# Altium PCB SystemM.PcbDoc
Units mm, origin at the board's own origin, x right, y up, seen from the top; angles counter-clockwise.
Board outline 120 x 76 mm, 4 copper layers (Top Layer, POWER, GND, Bottom Layer), stack 0.778 mm thick; 154 components, 135 nets, 622 pads, 2 vias.
Unrouted connection lines stored in the file: 395.
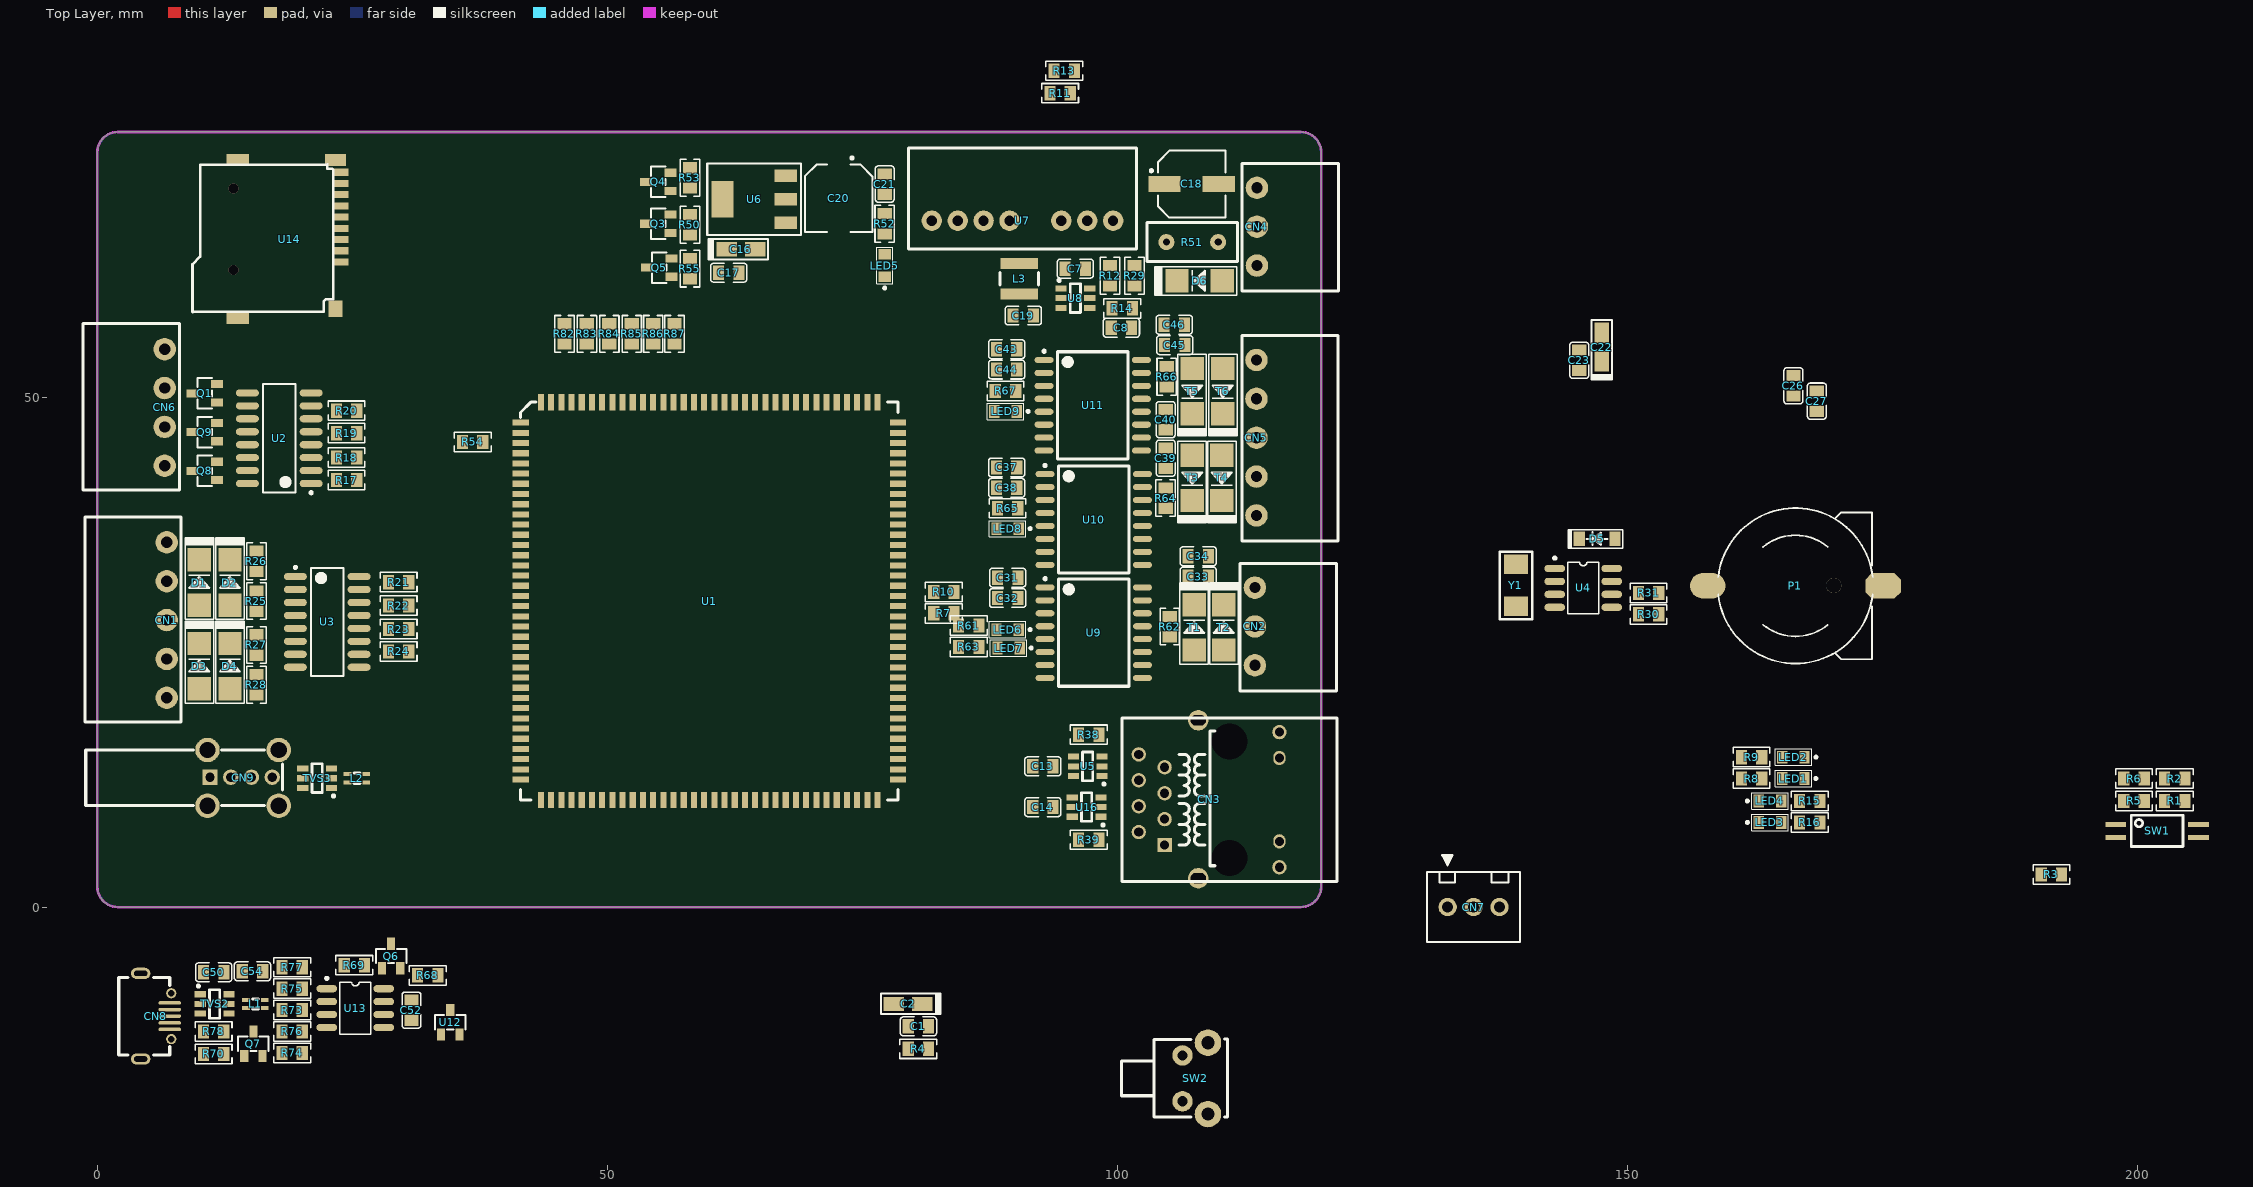
[diagram p0: Top Layer view]
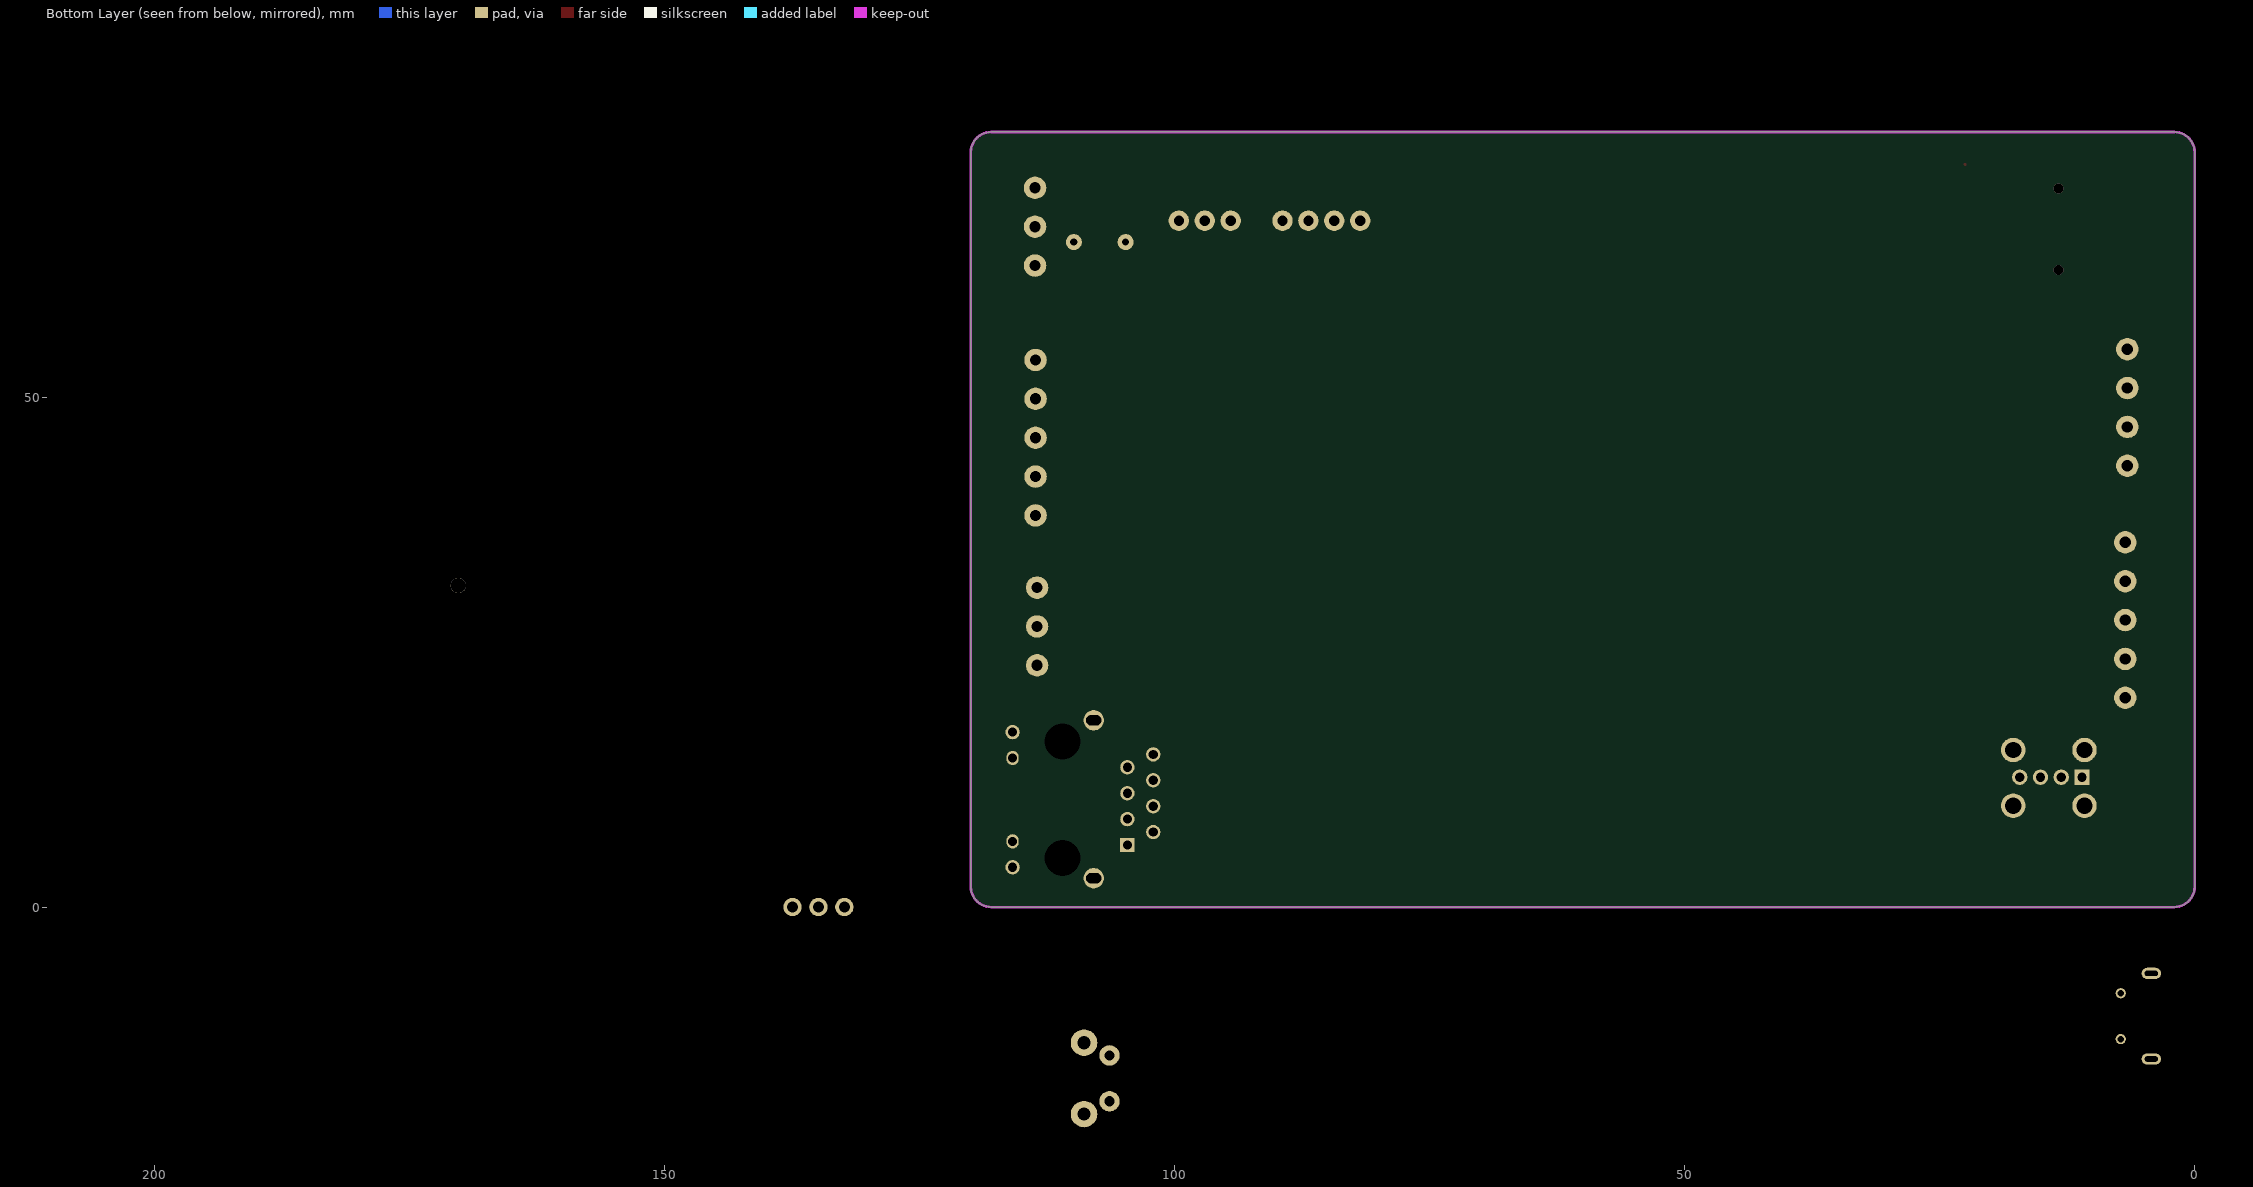
[diagram p1: Bottom Layer view, seen from below]
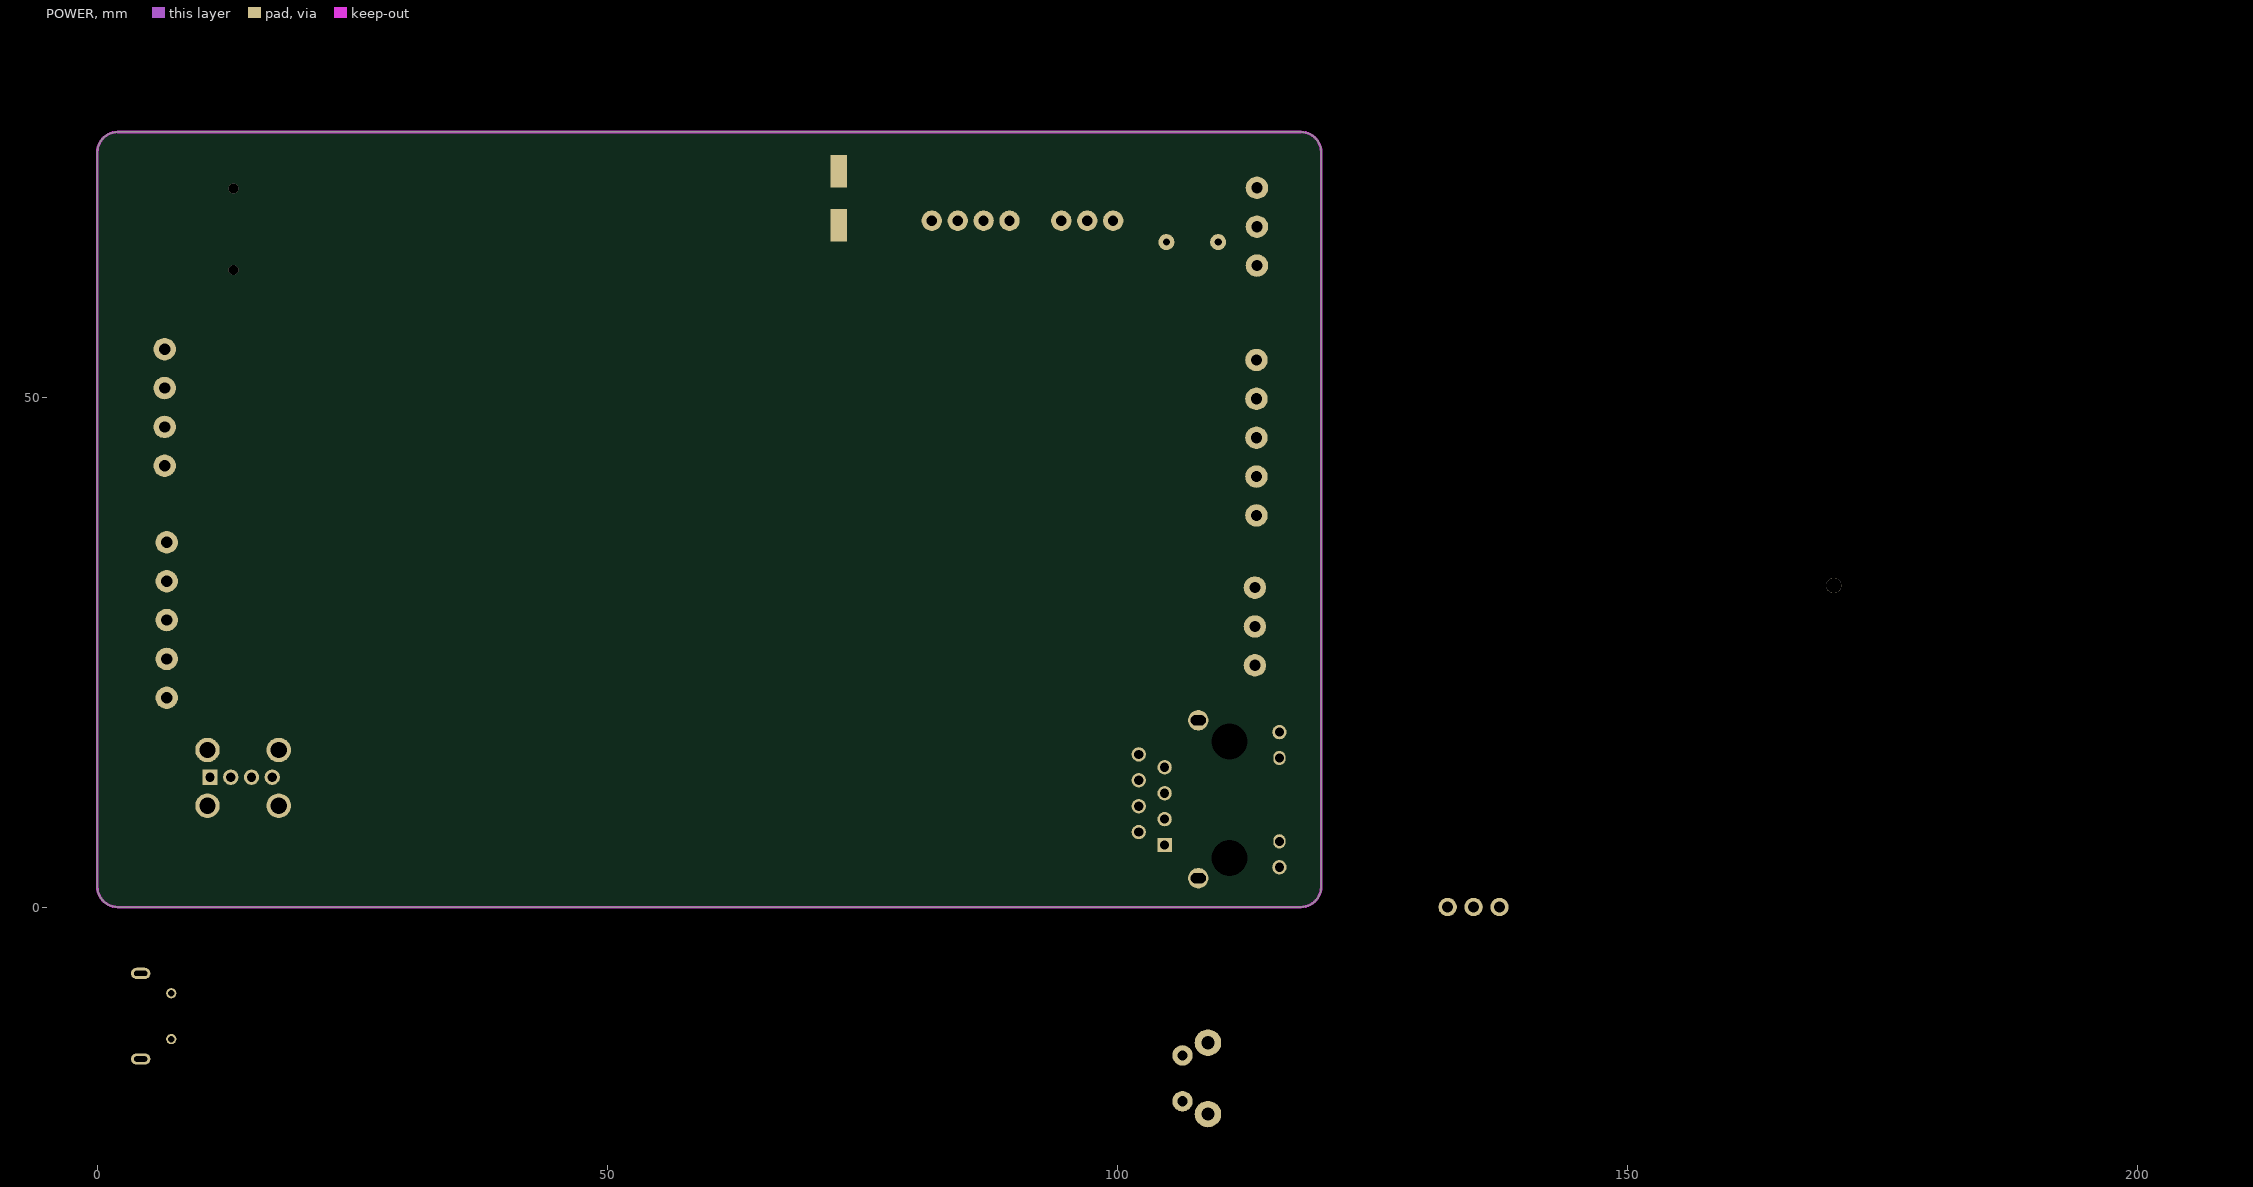
[diagram p2: POWER]

## Layer stack, top to bottom
Top Solder: solder mask 0.0102, Solder Resist, Dk 3.5
Top Layer: signal copper 0.0356
Dielectric 1: core 0.254, FR-4, Dk 4.2
POWER: signal copper 0.036
Dielectric 3: prepreg 0.127, Dk 4.2
GND: signal copper 0.036
Dielectric 2: core 0.254, Dk 4.2
Bottom Layer: signal copper 0.0356
Bottom Solder: solder mask 0.0102, Solder Resist, Dk 3.5

## Board outline
0,2 0,74 cw(c2,74) 2,76 118,76 cw(c118,74) 120,74 120,2 cw(c118,2) 118,0 2,0 cw(c2,2)

## Design rules (kind name [scope] priority, off if disabled: settings)
Clearance [All] p1: gap=0.254
PlaneClearance [All] p1: clearance=0.127
PolygonConnect [All] p1: connectstyle=Relief reliefconductorwidth=0.254 reliefentries=4 polygonreliefangle="90 Angle" airgapwidth=0.254
RoutingVias [All] p1: holewidth=0.711 width=1.27 viastyle="Through Hole" minholewidth=0.711 minwidth=1.27 maxholewidth=0.711 maxwidth=1.27
SolderMaskExpansion [All] p1: expansion=0.102
Width [All] p1: maxlimit=0.254 minlimit=0.254 preferedwidth=0.254
28 further rules are at their usual default settings.

## Classes and differential pairs
component class Usb_SdCard: C50 C52 C54 CN8 CN9 L1 L2 Q6 Q7 R68 R69 R70 R73 R74 R75 R76 R77 R78 R82 R83 R84 R85 R86 R87 TVS2 TVS3 U12 U13 U14
component class Uart_Can: C31 C32 C33 C34 C37 C38 C39 C40 C43 C44 C45 C46 CN2 CN5 CN7 LED6 LED7 LED8 LED9 R3 R4 R5 R6 R61 R62 R63 R64 R65 R66 R67 T1 T2 T3 T4 T5 T6 U9 U10 U11
component class Power: C7 C8 C16 C17 C18 C19 C20 C21 C22 C23 C26 C27 CN4 D6 L3 LED5 Q3 Q4 Q5 R11 R12 R13 R14 R29 R50 R51 R52 R53 R54 R55 U6 U7 U8
component class NetMY: C13 C14 CN3 R38 R39 U5 U16
component class Gpio_RTC: CN1 CN6 D1 D2 D3 D4 D5 P1 Q1 Q8 Q9 R17 R18 R19 R20 R21 R22 R23 R24 R25 R26 R27 R28 R30 R31 U2 U3 U4 Y1
component class CpuMY: C1 C2 LED1 LED2 LED3 LED4 R1 R2 R7 R8 R9 R10 R15 R16 SW1 SW2 U1

## Components (designator, comment, footprint, x,y, rotation, side; value= is the part's Value field where it differs from the comment)
C1 "104" 0805SMD_Cap 80.5,-11.7 r0 top
C2 "10uF/10V" "CASE A" 79.5,-9.5 r180 top
C7 "0.1uF" 0805SMD_Cap 95.9,62.6 r180 top
C8 "75pF" 0805SMD_Cap 100.4,56.8 r0 top
C13 "100nF" 0805SMD_Cap 92.7,13.8 r0 top
C14 "100nF" 0805SMD_Cap 92.7,9.8 r0 top
C16 "10uF/10V" "CASE A" 63.1,64.5 r0 top
C17 "104" 0805SMD_Cap 61.9,62.2 r0 top
C18 "47uF/50V" HONOR_63X54#1 107.3,70.9 r0 top
C19 "104" 0805SMD_Cap 90.8,58 r180 top
C20 "100uF/10V" HONOR_63X54#2 72.7,69.5 r270 top
C21 "104" 0805SMD_Cap 77.2,70.9 r270 top
C22 "10uF/10V" "CASE A" 147.5,54.9 r90 top
C23 "104" 0805SMD_Cap 145.3,53.6 r90 top
C26 "22uF" 0805SMD_Cap 166.3,51.1 r90 top
C27 "104" 0805SMD_Cap 168.6,49.6 r90 top
C31 "10uF" 0805SMD_Cap 89.25,32.3 r0 top
C32 "104" 0805SMD_Cap 89.25,30.3 r0 top
C33 "104" 0805SMD_Cap 107.95,32.4 r180 top
C34 "10uF" 0805SMD_Cap 107.95,34.4 r180 top
C37 "10uF" 0805SMD_Cap 89.15,43.1 r0 top
C38 "104" 0805SMD_Cap 89.15,41.1 r0 top
C39 "104" 0805SMD_Cap 104.75,44 r90 top
C40 "10uF" 0805SMD_Cap 104.75,47.8 r270 top
C43 "10uF" 0805SMD_Cap 89.15,54.7 r0 top
C44 "104" 0805SMD_Cap 89.15,52.7 r0 top
C45 "104" 0805SMD_Cap 105.65,55.1 r180 top
C46 "10uF" 0805SMD_Cap 105.6,57.1 r180 top
C50 "104" 0805SMD_Cap 11.4,-6.4 r0 top
C52 "104" 0805SMD_Cap 30.8,-10.1 r270 top
C54 "104" 0805SMD_Cap 15.2,-6.3 r0 top
CN1 "CON5" WJ15EDGRM-3.81-5P 6.8,35.76 r270 top locked
CN2 "CON3" WJ15EDGRM-3.81-3P-14-00A 113.5,23.7 r90 top
CN3 "HR911105A" RJ-45A12 115.9,3.9 r0 top locked
CN4 "CON3" WJ15EDGRM-3.81-3P-14-00A 113.7,62.9 r90 top
CN5 "CON5" WJ15EDGRM-3.81-5P 113.65,38.4 r90 top
CN6 "CON4" WJ15EDGRM-3.81-4P-14-00A 6.6,54.7 r270 top
CN7 "CON3" 连接器3X 132.4,0 r0 top
CN8 "MINI_USB" MICRO_USB 2.1,-10.7 r270 top
CN9 "USB-A-F-W" USB-C 17.15,12.733 r180 top
D1 "1N4148" 二极管SMA 10,29.6 r270 top
D2 "1N4148" 二极管SMA 13,29.6 r270 top
D3 "1N4148" 二极管SMA 10,21.4 r270 top
D4 "1N4148" 二极管SMA 13,21.4 r270 top
D5 "1N4148" 二极管SOD-123 148.8,36.1 r0 top
D6 "1N4007" 二极管SMA 110.3,61.4 r0 top
L1 "90" 2012 15.5,-9.5 r180 top
L2 "90" 2012 25.45,12.633 r180 top
L3 "磁珠" 4020 90.4,61.6 r270 top
LED1 "LED" 发光二极管0805 166.3,12.6 r180 top
LED2 "LED" 发光二极管0805 166.3,14.7 r180 top
LED3 "LED" 发光二极管0805 164,8.3 r0 top
LED4 "LED" 发光二极管0805 164,10.4 r0 top
LED5 "LED" 发光二极管0805 77.2,62.9 r90 top
LED6 "LED" 发光二极管0805 89.25,27.2 r180 top
LED7 "LED" 发光二极管0805 89.35,25.4 r180 top
LED8 "LED" 发光二极管0805 89.25,37.1 r180 top
LED9 "LED" 发光二极管0805 89.05,48.6 r180 top
P1 "BAT" CR1220 166.5,31.5 r90 top
Q1 "1318" SOT-23 10.539,50.37 r90 top
Q3 "MOS_P" SOT-23 55,67 r90 top
Q4 "MOS_P" SOT-23 55,71.1 r90 top
Q5 "IRFP360" "SOT-23 - MOS" 55.1,62.7 r90 top
Q6 "1318" SOT-23 28.8,-4.8 r0 top
Q7 "1318" SOT-23 15.3,-13.4 r0 top
Q8 "1318" SOT-23 10.539,42.77 r90 top
Q9 "1318" SOT-23 10.539,46.57 r90 top
R1 "1K" 0805_SMD_R 203.7,10.4 r180 top
R2 "1K" 0805_SMD_R 203.7,12.6 r180 top
R3 "10K" 0805_SMD_R 191.6,3.2 r0 top
R4 "10K" 0805_SMD_R 80.5,-13.9 r180 top
R5 "10K" 0805_SMD_R 199.7,10.4 r180 top
R6 "10K" 0805_SMD_R 199.7,12.6 r180 top
R7 "1K" 0805_SMD_R 83,28.8 r180 top
R8 "1K" 0805_SMD_R 162.2,12.6 r0 top
R9 "1K" 0805_SMD_R 162.2,14.7 r0 top
R10 "1K/NC" 0805_SMD_R 83,30.9 r180 top
R11 "511K" 0805_SMD_R 94.4,79.8 r0 top
R12 "49.9" 0805_SMD_R 99.3,61.9 r90 top
R13 "100K" 0805_SMD_R 94.8,82 r0 top
R14 "100K" 0805_SMD_R 100.5,58.7 r180 top
R15 "1K" 0805_SMD_R 167.9,10.4 r0 top
R16 "1K" 0805_SMD_R 167.9,8.3 r0 top
R17 "1K" 0805_SMD_R 24.439,41.87 r0 top
R18 "1K" 0805_SMD_R 24.439,44.07 r0 top
R19 "1K" 0805_SMD_R 24.439,46.47 r0 top
R20 "1K" 0805_SMD_R 24.439,48.67 r0 top
R21 "1K" 0805_SMD_R 29.539,31.858 r0 top
R22 "1K" 0805_SMD_R 29.539,29.558 r0 top
R23 "1K" 0805_SMD_R 29.539,27.258 r0 top
R24 "1K" 0805_SMD_R 29.539,25.058 r0 top
R25 "4.7K" 0805_SMD_R 15.6,30 r90 top
R26 "4.7K" 0805_SMD_R 15.6,33.9 r270 top
R27 "4.7K" 0805_SMD_R 15.6,25.7 r270 top
R28 "4.7K" 0805_SMD_R 15.6,21.8 r270 top
R29 "13.3K" 0805_SMD_R 101.7,61.9 r270 top
R30 "1K" 0805_SMD_R 152.1,28.7 r180 top
R31 "1K" 0805_SMD_R 152.1,30.8 r180 top
R38 "1K" 0805_SMD_R 97.2,16.9 r180 top
R39 "1K" 0805_SMD_R 97.2,6.6 r180 top
R50 "10K" 0805_SMD_R 58.1,66.9 r90 top
R51 "10d330K" RAD0.2 109.9,65.2 r180 top
R52 "4.7K" 0805_SMD_R 77.2,67 r90 top
R53 "10K" 0805_SMD_R 58.1,71.5 r90 top
R54 "1K" 0805_SMD_R 36.8,45.6 r180 top
R55 "100K" 0805_SMD_R 58.1,62.6 r90 top
R61 "1K" 0805_SMD_R 85.45,27.6 r180 top
R62 "120" 0805_SMD_R 105.15,27.5 r90 top
R63 "1K" 0805_SMD_R 85.45,25.5 r180 top
R64 "120" 0805_SMD_R 104.75,40.1 r90 top
R65 "1K" 0805_SMD_R 89.25,39.1 r0 top
R66 "120" 0805_SMD_R 104.85,52 r90 top
R67 "1K" 0805_SMD_R 89.05,50.6 r0 top
R68 "10K" 0805_SMD_R 32.4,-6.7 r180 top
R69 "10K" 0805_SMD_R 25.2,-5.7 r0 top
R70 "1K" 0805_SMD_R 11.4,-14.4 r180 top
R73 "0" 0805_SMD_R 19.1,-10.1 r180 top
R74 "10K" 0805_SMD_R 19.1,-14.3 r180 top
R75 "0" 0805_SMD_R 19.1,-8 r0 top
R76 "10K" 0805_SMD_R 19.1,-12.2 r180 top
R77 "10K" 0805_SMD_R 19.1,-5.9 r180 top
R78 "10K" 0805_SMD_R 11.4,-12.2 r180 top
R82 "10K" 0805_SMD_R 45.8,56.2 r270 top
R83 "10K" 0805_SMD_R 48,56.2 r270 top
R84 "10K" 0805_SMD_R 50.2,56.2 r270 top
R85 "10K" 0805_SMD_R 52.4,56.2 r270 top
R86 "10K" 0805_SMD_R 54.5,56.2 r270 top
R87 "10K" 0805_SMD_R 56.6,56.2 r270 top
SW1 "DSHP02TSGET" DSHP02TSGET 197.9,8.1 r270 top
SW2 "RST" SW4 106.4,-16.8 r270 top
T1 "7V" 二极管SMA 107.55,25.2 r270 top
T2 "7V" 二极管SMA 110.45,25.2 r270 top
T3 "7V" 二极管SMA 107.35,44.3 r90 top
T4 "7V" 二极管SMA 110.25,44.3 r90 top
T5 "7V" 二极管SMA 107.35,52.8 r90 top
T6 "7V" 二极管SMA 110.35,52.8 r90 top
TVS2 "USBLC6-2SC6" SOT-23-6 11.5,-9.5 r180 top
TVS3 "USBLC6-2SC6" SOT-23-6 21.55,12.633 r0 top
U1 "MYC-Y6ULX" MYIMX6 60,30 r270 top
U2 "TLP281-4" SOIC127P700X210-16M 17.839,45.97 r180 top
U3 "TLP281-4" SOIC127P700X210-16M 22.539,27.958 r0 top
U4 "ISL1208" 运放SO8 142.9,33.2 r0 top
U5 "USBLC6-2SC6" SOT-23-6 97.1,13.8 r0 top
U6 "LM1117MPX-3.3" SOT-223 67.5,69.4 r90 top
U7 "VRBS2405" VRB_S 99.6,67.3 r180 top
U8 "TPS54302" SOT-23-6 95.9,59.7 r180 top
U9 "ISO1050DWR" SOIC_16 97.7,26.9 r0 top
U10 "ISO3082DWR" SOIC_16 97.7,38 r0 top
U11 "ISO3082DWR" SOIC_16 97.6,49.2 r0 top
U12 "MOS_P" SOT-23 34.6,-11.3 r0 top
U13 "MIC2026-1YM" 运放SO8 22.5,-8 r0 top
U14 "TF" TF 18.8,65.5 r180 top
U16 "USBLC6-2SC6" SOT-23-6 97,9.8 r0 top
Y1 "32.768Khz" XTAL_0503_2Pin 139.1,29.5 r90 top

## Footprints (in the part's own frame and the unit in brackets; to place one, negate y for a bottom-side part, rotate by r counter-clockwise, add the part's x,y. Pads: shape width x height; smd on the part's side, far side on the other; paste and mask are expansions set on the pad)
0805_SMD_R [mm]
  rect 1.1x1.4 smd: 1(-1,0) 2(1,0)
  silkscreen extent -1.8,-0.95 1.8,0.95, body extent -1,-0.63 1,0.63, height 0.47
0805SMD_Cap [mm]
  rect 1.1x1.4 smd: 1(-0.991,0) 2(1.009,0)
  silkscreen extent -1.77,-0.92 1.78,0.93, body extent -0.99,-0.63 1.01,0.63, height 1.25
2012 [mm] "2.0x1.2x1.0 共模电感"
  rect 0.75x0.4 smd: 1(-0.925,0.4) 2(-0.925,-0.4) 3(0.925,-0.4) 4(0.925,0.4)
  silkscreen extent -0.3,-0.5 0.3,0.5
4020 [mm] "40*40*20"
  rect 1.1x3.7 smd: 1(-1.5,0) 2(1.5,0)
  silkscreen extent -0.6,-1.9 0.6,1.9
"CASE A" [mm] "3216"
  rect 2x1.4 smd: 1(-1.4,0) 2(1.4,0)
  silkscreen extent -3.2,-1.01 2.68,1.01, body extent -1.6,-0.8 1.6,0.8, height 1.61
CR1220 [mm]
  round 1.5 hole 1.5 unplated: 0(0.025,-3.75)
  oct 2.5x3.46 smd: 1(0,-8.6)
  oval 2.5x3.46 smd: 2(0,8.6)
  silkscreen extent -7.62,-7.57 7.62,7.57, body extent -7.48,-9.25 7.52,9.25, height 4.18
DSHP02TSGET [mil] "拨码开关2p 1.27mm"
  rect 20x80 smd: 1(0,0) 2(50,0) 3(50,320) 4(0,320)
  silkscreen extent -35,60 85,260
HONOR_63X54#1 [mm]
  rect 3.15x1.6 smd: 1(-2.65,0) 2(2.65,0)
  silkscreen extent -4.07,-3.3 3.3,3.3
HONOR_63X54#2 [mm]
  rect 3.15x1.6 on Mid1: 1(-2.65,0) 2(2.65,0)
  silkscreen extent -4.07,-3.3 3.3,3.3
MICRO_USB [mm]
  oval 0.35x2.2 smd: 1(-1.3,5) 2(-0.65,5) 3(0,5) 4(0.65,5) 5(1.3,5)
  round 1 hole 0.65: 6(-2.25,5.15) 7(2.25,5.15)
  oval 1.1x1.9 hole 0.5 slot 1.3 at 90 deg: 8(-4.2,2.15) 9(4.2,2.15)
  silkscreen extent -3.8,0 3.8,5
MYIMX6 [mm]
  rect 0.6x1.6 smd: 1(-17.5,-18.5) 2(-16.5,-18.5) 3(-15.5,-18.5) 4(-14.5,-18.5) 5(-13.5,-18.5) 6(-12.5,-18.5) 7(-11.5,-18.5) 8(-10.5,-18.5) 9(-9.5,-18.5) 10(-8.5,-18.5) 11(-7.5,-18.5) 12(-6.5,-18.5) 13(-5.5,-18.5) 14(-4.5,-18.5) 15(-3.5,-18.5) 16(-2.5,-18.5) 17(-1.5,-18.5) 18(-0.5,-18.5) 19(0.5,-18.5) 20(1.5,-18.5) 21(2.5,-18.5) 22(3.5,-18.5) 23(4.5,-18.5) 24(5.5,-18.5) 25(6.5,-18.5) 26(7.5,-18.5) 27(8.5,-18.5) 28(9.5,-18.5) 29(10.5,-18.5) 30(11.5,-18.5) 31(12.5,-18.5) 32(13.5,-18.5) 33(14.5,-18.5) 34(15.5,-18.5) 35(16.5,-18.5) 36(17.5,-18.5) 71(17.5,18.5) 72(16.5,18.5) 73(15.5,18.5) 74(14.5,18.5) 75(13.5,18.5) 76(12.5,18.5) 77(11.5,18.5) 78(10.5,18.5) 79(9.5,18.5) 80(8.5,18.5) 81(7.5,18.5) 82(6.5,18.5) 83(5.5,18.5) 84(4.5,18.5) 85(3.5,18.5) 86(2.5,18.5) 87(1.5,18.5) 88(0.5,18.5) 89(-0.5,18.5) 90(-1.5,18.5) 91(-2.5,18.5) 92(-3.5,18.5) 93(-4.5,18.5) 94(-5.5,18.5) 95(-6.5,18.5) 96(-7.5,18.5) 97(-8.5,18.5) 98(-9.5,18.5) 99(-10.5,18.5) 100(-11.5,18.5) 101(-12.5,18.5) 102(-13.5,18.5) 103(-14.5,18.5) 104(-15.5,18.5) 105(-16.5,18.5) 106(-17.5,18.5)
  rect 1.6x0.6 smd: 37(19.5,-16.5) 38(19.5,-15.5) 39(19.5,-14.5) 40(19.5,-13.5) 41(19.5,-12.5) 42(19.5,-11.5) 43(19.5,-10.5) 44(19.5,-9.5) 45(19.5,-8.5) 46(19.5,-7.5) 47(19.5,-6.5) 48(19.5,-5.5) 49(19.5,-4.5) 50(19.5,-3.5) 51(19.5,-2.5) 52(19.5,-1.5) 53(19.5,-0.5) 54(19.5,0.5) 55(19.5,1.5) 56(19.5,2.5) 57(19.5,3.5) 58(19.5,4.5) 59(19.5,5.5) 60(19.5,6.5) 61(19.5,7.5) 62(19.5,8.5) 63(19.5,9.5) 64(19.5,10.5) 65(19.5,11.5) 66(19.5,12.5) 67(19.5,13.5) 68(19.5,14.5) 69(19.5,15.5) 70(19.5,16.5) 107(-19.5,16.5) 108(-19.5,15.5) 109(-19.5,14.5) 110(-19.5,13.5) 111(-19.5,12.5) 112(-19.5,11.5) 113(-19.5,10.5) 114(-19.5,9.5) 115(-19.5,8.5) 116(-19.5,7.5) 117(-19.5,6.5) 118(-19.5,5.5) 119(-19.5,4.5) 120(-19.5,3.5) 121(-19.5,2.5) 122(-19.5,1.5) 123(-19.5,0.5) 124(-19.5,-0.5) 125(-19.5,-1.5) 126(-19.5,-2.5) 127(-19.5,-3.5) 128(-19.5,-4.5) 129(-19.5,-5.5) 130(-19.5,-6.5) 131(-19.5,-7.5) 132(-19.5,-8.5) 133(-19.5,-9.5) 134(-19.5,-10.5) 135(-19.5,-11.5) 136(-19.5,-12.5) 137(-19.5,-13.5) 138(-19.5,-14.5) 139(-19.5,-15.5) 140(-19.5,-16.5)
  silkscreen extent -19.5,-18.5 19.5,18.5
RAD0.2 [mil] "压敏电阻10d"
  round 62 hole 28: 1(0,0) 2(200,0)
  silkscreen extent -75,-75 275,75
RJ-45A12 [mm]
  round 0 hole 3.5 unplated: 0(-4.9,0.91) 0(-4.9,12.34)
  rect 1.4x1.4 hole 0.9: 1(-11.25,2.18)
  round 1.4 hole 0.9: 2(-13.79,3.45) 3(-11.25,4.72) 4(-13.79,5.99) 5(-11.25,7.26) 6(-13.79,8.53) 7(-11.25,9.8) 8(-13.79,11.07) 9(0,0) 12(0,13.25)
  oval 1.2x1.4 hole 0.9: 10(0,2.54) 11(0,10.71)
  round 2 hole 1 slot 1.5 at 0 deg: 13(-7.95,14.41) 14(-7.95,-1.07)
  silkscreen extent -15.44,-1.38 5.64,14.63
SOIC127P700X210-16M [mm]
  oval 2.25x0.7 smd: 1(-3.125,4.445) 2(-3.125,3.175) 3(-3.125,1.905) 4(-3.125,0.635) 5(-3.125,-0.635) 6(-3.125,-1.905) 7(-3.125,-3.175) 8(-3.125,-4.445) 9(3.125,-4.445) 10(3.125,-3.175) 11(3.125,-1.905) 12(3.125,-0.635) 13(3.125,0.635) 14(3.125,1.905) 15(3.125,3.175) 16(3.125,4.445)
  silkscreen extent -3.25,-5.3 1.6,5.47, body extent -2.32,-5.27 2.33,5.28, height 2.1
SOIC_16 [mm]
  oval 1.85x0.6 smd: 1(-4.775,4.445) 2(-4.775,3.175) 3(-4.775,1.905) 4(-4.775,0.635) 5(-4.775,-0.635) 6(-4.775,-1.905) 7(-4.775,-3.175) 8(-4.775,-4.445) 9(4.775,-4.445) 10(4.775,-3.175) 11(4.775,-1.905) 12(4.775,-0.635) 13(4.775,0.635) 14(4.775,1.905) 15(4.775,3.175) 16(4.775,4.445)
  silkscreen extent -4.9,-5.25 3.45,5.42, body extent -3.75,-5.25 3.75,5.25, height 2.65
SOT-23 [mm]
  rect 0.8x1.2 smd: 1(-0.9,-1.2) 2(0.9,-1.2) 3(0,1.2)
  silkscreen extent -1.5,-0.7 1.5,0.7, body extent -1.45,-1.4 1.45,1.4, height 1.1
"SOT-23 - MOS" [mm]
  rect 0.8x1.2 smd: D(0,1.2) G(-0.9,-1.2) S(0.9,-1.2)
  silkscreen extent -1.5,-0.7 1.5,0.7, body extent -1.45,-1.4 1.45,1.4, height 1.1
SOT-23-6 [mm]
  rect 1.1x0.6 smd: 1(1.4,-0.95) 2(1.4,0) 3(1.4,0.95) 4(-1.4,0.95) 5(-1.4,0) 6(-1.4,-0.95)
  silkscreen extent -0.5,-1.87 1.72,1.4
SOT-223 [mm]
  rect 1.2x2.2 smd: 1(-2.3,0) 2(0,0) 3(2.3,0)
  rect 3.6x2.2 smd: 2(0,6.2)
  silkscreen extent -3.5,-1.5 3.5,7.7
SW4 [mm] "按钮侧立式"
  round 2.6 hole 1.3: 0(-3.5,2.5) 0(3.5,2.5)
  round 2 hole 1: 1(-2.25,0) 2(2.25,0)
  silkscreen extent -3.85,-6 3.8,4.4
TF [mm]
  rect 2.2x1.2 smd: 0(5.05,-7.75) 11(5.05,7.75)
  rect 1.6x0.7 smd: 1(-5.05,2.25) 2(-5.05,1.15) 3(-5.05,0.05) 4(-5.05,-1.05) 5(-5.05,-2.15) 6(-5.05,-3.25) 7(-5.05,-4.35) 8(-5.05,-5.45) 10(-5.05,-6.55)
  rect 2.035x1.149 smd: 9(-4.55,-7.75)
  rect 1.4x1.6 smd: 12(-4.55,6.85)
  Top Layer lines w0.254: -3.688,-7.293 -3.738,-7.344
  silkscreen extent -4.35,-7.34 9.47,7.15, body extent -5.71,-8.07 9.5,8.24, height 1.95
USB-C [mm] "立式USB"
  rect 1.5x1.5 hole 0.9: 1(6.096,0)
  round 1.5 hole 0.9: 2(4.064,0) 3(2.032,0) 4(0,0)
  round 2.4 hole 1.6: 5(6.35,2.794) 6(-0.635,2.794) 7(-0.635,-2.667) 8(6.35,-2.667)
  silkscreen extent -1.02,-2.67 18.29,2.79
VRB_S [mm]
  round 2 hole 1: 1(0,0) 2(2.54,0) 3(5.08,0) 5(10.16,0) 6(12.7,0) 7(15.24,0) 8(17.78,0)
  silkscreen extent -2.29,-7.11 20.07,2.79
WJ15EDGRM-3.81-3P-14-00A [mm] "3.81间距端子 3p"
  round 2.2 hole 1.1: 1(0,0) 2(3.81,0) 3(7.62,0)
  silkscreen extent -2.5,-8 10,1.45, body extent -2.5,-8 10,1.25, height 7
WJ15EDGRM-3.81-4P-14-00A [mm]
  round 2.2 hole 1.1: 1(0,0) 2(3.81,0) 3(7.62,0) 4(11.43,0)
  silkscreen extent -2.5,-8 13.81,1.45, body extent -2.5,-8 13.75,1.25, height 7
WJ15EDGRM-3.81-5P [mm]
  round 2.2 hole 1.1: 1(0,0) 2(3.81,0) 3(7.62,0) 4(11.43,0) 5(15.24,0)
  silkscreen extent -2.5,-8 17.62,1.4, body extent -2.5,-8 17.6,1.3, height 7
XTAL_0503_2Pin [mm]
  rect 1.9x2.4 smd: 1(0,0) 2(4.1,0)
  silkscreen extent -1.27,-1.6 5.33,1.6, body extent -1.14,-1.52 5.33,1.52, height 1.05
二极管SMA [mil] "Magnetic-Core Inductor with Windin"
  rect 90x90 smd: A(0,0) K(-175,0)
  silkscreen extent -260,-55 55,56, body extent -187,-49 6,49, height 83
二极管SOD-123 [mm]
  rect 1.1x1.4 smd: A(0,0) K(-3.5,0)
  silkscreen extent -4.6,-0.9 0.75,0.9, body extent -3,-0.64 -0.5,0.61, height 0.72
发光二极管0805 [mm]
  rect 1x1.25 smd: A(1.1,0) K(-1.1,0)
  silkscreen extent -2.32,-0.8 1.8,0.8, body extent -1,-0.63 1,0.63, height 0.81
运放SO8 [mil] "Smal"
  oval 80x28 smd: 1(0,0) 2(0,-50) 3(0,-100) 4(0,-150) 5(220,-150) 6(220,-100) 7(220,-50) 8(220,0)
  silkscreen extent -5,-175 170,45, body extent -9,-172 227,21, height 63
连接器3X [mil]
  round 71 hole 43: 1(0,0) 2(100,0) 3(200,0)
  silkscreen extent -80,-135 280,200

## Part data
C1 C7 C8 C13 C14 C17 C19 C21 C23 C26 C27 C31 C32 C33 C34 C37 C38 C39 C40 C43 C44 C45 C46 C50 C52 C54: library part SMD_Cap, "贴片电容"
C2 C16 C18 C20 C22: library part "CAP  POL", "电解电容"
CN1 CN2 CN4 CN5 CN6 CN7: "连接器"
D1 D2 D3 D4 D5 D6: library part DIODE, "二极管"
L1 L2: library part 共模电感
LED1 LED2 LED3 LED4 LED5 LED6 LED7 LED8 LED9: "发光二极管"
Q1 Q6 Q7 Q8 Q9: library part 三极管, "三极管"
Q5: library part "MOSFET N", "MOS管"
R1 R2 R3 R4 R5 R6 R7 R8 R9 R10 R11 R12 R13 R14 R15 R16 R17 R18 R19 R20 R21 R22 R23 R24 R25 R26 R27 R28 R29 R30 R31 R38 R39 R50 R52 R53 R54 R55 R61 R62 R63 R64 R65 R66 R67 R68 R69 R70 R73 R74 R75 R76 R77 R78 R82 R83 R84 R85 R86 R87: library part SMD_0805, "贴片电阻"
R51: library part 压敏电阻, "压敏电阻"
SW1: library part 拨码开关
SW2: library part Button, "按键12*12*7.3"
T1 T2 T3 T4 T5 T6: library part 双向TVS_?V(SMA), "双向TVS_?V(SMA)"
U4: "时钟芯片"
U6: "LM1117 3.3V固定输出"
U8: library part TPS54302DDCR
U9: "CAN隔离芯片"
U10 U11: "485隔离芯片"
Y1: library part XTAL, "无源晶振贴装"

## Via types
v1: diameter 1, hole 1, Top Layer to Bottom Layer, 2 vias

## Nets (pads, with @x,y where several pads share a name; then routed paths per layer and width w, separated by ;. In a path a pad name is that pad's centre, name@x,y a point inside that pad or via, vN(x,y) a via of type N, cw(c..) or ccw(c..) an arc to the next point about the centre after c; other vN are vias at no path point)
3.3V: C13.2 C14.2 C31.2 C32.2 C37.2 C38.2 C43.2 C44.2 CN3.4 CN3.5 CN3.12 D5.A Q3.3 R8.1 R9.1 R15.2 R16.2 R17.2 R18.2 R19.2 R20.2 R21.2 R22.2 R23.2 R24.2 R30.1 R31.1 R61.2 R63.2 R65.2 R67.2 R69.1 R70.1 R74.1 R77.2 R82.2 R83.2 R84.2 R85.2 R86.2 R87.2 U4.8 U5.5 U9.1 U10.1 U11.1 U14.4 U16.5
3.3V_SYS: C16.1 C17.1 Q3.2 R50.2 U6.2
3V3_SYS: C1.2 C2.1 U1.37 U1.38
5V: C22.1 C23.1 C52.1 Q4.3 U13.7
5V_COMM: C26.1 C27.1 C33.2 C34.2 C39.2 C40.2 C45.2 C46.2 L3.1 R3.1 R5.1 R12.2 U9.16 U10.16 U11.16
5V_SYS: C20.1 C21.1 Q4.2 R52.2 R53.2 U6.3 U7.6
24V: C18.1 C19.1 D6.K R51.2 U2.10 U7.2 U8.3
BOOT_MODE0: SW1.2 U1.4
BOOT_MODE1: SW1.1 U1.5
CAN1_RXD: LED6.K U1.62 U9.3
CAN1_TXD: LED7.K U1.63 U9.6
EARTH: CN3.8 CN3.13 CN3.14 CN4.3 CN8.6 CN8.7 CN8.8 CN8.9 CN9.5 CN9.6 CN9.7 CN9.8
ENET1_LED1: CN3.9 U1.69
ENET1_LED2: R38.2 U1.70
ENET1_RXN: U1.75 U5.6
ENET1_RXP: U1.76 U5.4
ENET1_TXN: U1.72 U16.6
ENET1_TXP: U1.73 U16.4
GND: C1.1 C2.2 C13.1 C14.1 C16.2 C17.2 C20.2 C21.2 C22.2 C23.2 C31.1 C32.1 C37.1 C38.1 C43.1 C44.1 C50.2 C52.2 C54.2 CN7.3 CN9.4 LED5.K P1.2 Q5.S Q6.2 Q7.2 R1.2 R2.2 R7.1 R10.1 R39.2 R55.2 SW2.2 TVS2.2 TVS3.2 U1.6 U1.16 U1.23 U1.26 U1.29 U1.32 U1.35 U1.36 U1.50 U1.59 U1.68 U1.71 U1.74 U1.77 U1.86 U1.95 U1.104 U1.113 U1.121 U1.128 U3.9 U3.11 U3.13 U3.15 U4.4 U5.2 U6.1 U7.8 U9.2 U9.7 U9.8 U10.2 U10.7 U10.8 U11.2 U11.7 U11.8 U13.6 U14.6 U14.9 U16.2
GND_COMM: C18.2 C19.2 C26.2 C27.2 C33.1 C34.1 C39.1 C40.1 C45.1 C46.1 CN2.1 CN4.2 CN5.3 R4.2 R6.2 R13.2 R29.1 R51.1 T1.A T2.A T3.A T4.A T5.K T6.K U7.1 U8.1 U9.9 U9.10 U9.15 U10.9 U10.10 U10.15 U11.9 U11.10 U11.15
GPIO-1: R24.1 U3.10
GPIO-2: R23.1 U3.12
GPIO-3: R22.1 U3.14
GPIO_1: U1.41
GPIO_2: U1.42
GPIO_3: U1.43
GPIO_4: R21.1 U1.44 U3.16
GPIO_8: U1.48 U2.6
GPIO_9: U1.49
I2C1_SCL: R31.2 U1.64 U4.6
I2C1_SDA: R30.2 U1.65 U4.5
NetC7_1: C7.1 U8.6
NetC7_2: C7.2 L3.2 U8.2
NetC8_1: C8.1 R12.1 R14.2
NetC8_2: C8.2 R14.1 R29.2 U8.4
NetC50_1: C50.1 CN8.1 R68.1 TVS2.5 U12.2 U13.8
NetCN1_1: CN1.1 R26.1
NetCN1_2: CN1.2 R25.1
NetCN1_3: CN1.3 D1.A D2.A D3.A D4.A U3.2 U3.4 U3.6 U3.8
NetCN1_4: CN1.4 R27.1
NetCN1_5: CN1.5 R28.1
NetCN2_2: CN2.2 R62.1 T1.K U9.12
NetCN2_3: CN2.3 R62.2 T2.K U9.13
NetCN3_1: CN3.1 U16.3
NetCN3_2: CN3.2 U16.1
NetCN3_3: CN3.3 U5.3
NetCN3_6: CN3.6 U5.1
NetCN3_10: CN3.10 R39.1
NetCN3_11: CN3.11 R38.1
NetCN4_1: CN4.1 D6.A
NetCN5_1: CN5.1 R3.2 R64.2 T3.K T4.K U10.13
NetCN5_2: CN5.2 R4.1 R64.1 U10.12
NetCN5_4: CN5.4 R5.2 R66.2 T6.A U11.13
NetCN5_5: CN5.5 R6.1 R66.1 T5.A U11.12
NetCN6_1: CN6.1 Q1.2 Q8.2 Q9.2
NetCN6_2: CN6.2 Q1.3 U2.12
NetCN6_3: CN6.3 Q9.3 U2.14
NetCN6_4: CN6.4 Q8.3 U2.16
NetCN8_2: CN8.2 TVS2.6
NetCN8_3: CN8.3 TVS2.4
NetCN9_2: CN9.2 TVS3.6
NetCN9_3: CN9.3 TVS3.4
NetD1_K: D1.K R25.2 U3.1
NetD2_K: D2.K R26.2 U3.3
NetD3_K: D3.K R27.2 U3.5
NetD4_K: D4.K R28.2 U3.7
NetD5_K: D5.K P1.1 U4.3
NetL1_3: L1.3 TVS2.3
NetL1_4: L1.4 TVS2.1
NetL2_3: L2.3 TVS3.3
NetL2_4: L2.4 TVS3.1
NetLED1_A: LED1.A R8.2
NetLED1_K: LED1.K U1.9
NetLED2_A: LED2.A R9.2
NetLED2_K: LED2.K U1.8
NetLED3_A: LED3.A R16.1
NetLED3_K: LED3.K U1.10
NetLED4_A: LED4.A R15.1
NetLED4_K: LED4.K U1.11
NetLED5_A: LED5.A R52.1
NetLED6_A: LED6.A R61.1
NetLED7_A: LED7.A R63.1
NetLED8_A: LED8.A R65.1
NetLED9_A: LED9.A R67.1
NetQ1_1: Q1.1 U2.11
NetQ5_G: Q5.G R54.2 R55.1
NetQ6_1: Q6.1 R69.2
NetQ6_3: Q6.3 R68.2 U12.1
NetQ7_1: Q7.1 R78.1
NetQ7_3: Q7.3 R74.2 R76.2
NetQ8_1: Q8.1 U2.15
NetQ9_1: Q9.1 U2.13
NetR1_1: R1.1 SW1.4
NetR2_1: R2.1 SW1.3
NetR7_2: R7.2 U1.93
NetR10_2: R10.2 U1.94
NetR11_1: R11.1 R13.1 U8.5
NetR17_1: R17.1 U2.1
NetR18_1: R18.1 U2.3
NetR19_1: R19.1 U2.5
NetR20_1: R20.1 U2.7
NetR73_2: R73.2 R76.1 U13.4
NetR75_2: R75.2 R77.1 U13.1
NetSW2_1: SW2.1 U1.2
NetU4_1: U4.1 Y1.2
NetU4_2: U4.2 Y1.1
OUT1: U2.2
OUT2: U2.4
PMIC_ON_EN: R11.2 U2.9
PMIC_ON_REQ: R54.1 U1.3
PMIC_ON_REQ_5V: Q3.1 Q4.1 Q5.D R50.1 R53.1 U2.8
SD1_CHECK: U1.53 U14.10
SD1_CLK: R85.1 U1.127 U14.5
SD1_CMD: R84.1 U1.126 U14.3
SD1_DATA0: R86.1 U1.125 U14.7
SD1_DATA1: R87.1 U1.124 U14.8
SD1_DATA2: R82.1 U1.123 U14.1
SD1_DATA3: R83.1 U1.122 U14.2
UART1_RXD: CN7.2 U1.52
UART1_TXD: CN7.1 U1.51
UART2_EN: U1.57 U10.4 U10.5
UART2_RXD: U1.56 U10.3
UART2_TXD: LED8.K U1.55 U10.6
UART3_EN: U1.58 U11.4 U11.5
UART3_RXD: U1.61 U11.3
UART3_TXD: LED9.K U1.60 U11.6
USB_OTG1_OC: R75.1 U13.2
USB_OTG1_VBUS: U1.24 U12.3
USB_OTG2_DN: L2.1 U1.28
USB_OTG2_DP: L2.2 U1.27
USB_OTG2_OC: R73.1 U13.3
USB_OTG2_VBUS: C54.1 CN9.1 TVS3.5 U1.25 U13.5
USB_OTG_DN: L1.1 U1.30
USB_OTG_DP: L1.2 U1.31
USB_OTG_ID: CN8.4 R70.2 R78.2 U1.40
pads on no net: CN3.0 CN3.7 CN8.5 P1.0 SW2.0 U1.1 U1.7 U1.12 U1.13 U1.14 U1.15 U1.17 U1.18 U1.19 U1.20 U1.21 U1.22 U1.33 U1.34 U1.39 U1.45 U1.46 U1.47 U1.54 U1.66 U1.67 U1.78 U1.79 U1.80 U1.81 U1.82 U1.83 U1.84 U1.85 U1.87 U1.88 U1.89 U1.90 U1.91 U1.92 U1.96 U1.97 U1.98 U1.99 U1.100 U1.101 U1.102 U1.103 U1.105 U1.106 U1.107 U1.108 U1.109 U1.110 U1.111 U1.112 U1.114 U1.115 U1.116 U1.117 U1.118 U1.119 U1.120 U1.129 U1.130 U1.131 U1.132 U1.133 U1.134 U1.135 U1.136 U1.137 U1.138 U1.139 U1.140 U4.7 U7.3 U7.5 U7.7 U9.4 U9.5 U9.11 U9.14 U10.11 U10.14 U11.11 U11.14 U14.0 U14.11 U14.12
copper on no net:
  other v1: 13.35,62.45 13.35,70.45

## Keep-outs
Keep-Out Layer:
  the board outline again, w0.254

## Silkscreen, mask and mechanical layers (free items; w line width, h text height)
Mechanical 1:
  lines w0.254: -4.04,2.4 -1.5,2.4 ; -3.024,1.892 -1.5,2.4 ; -3.024,2.908 -1.5,2.4 ; -1.5,2.146 -1.5,2.654 ; 0,2.146 0,2.654 ; 1.524,1.892 0,2.4 ; 1.524,2.908 0,2.4 ; 2.54,2.4 0,2.4
  lines w0.3: 0.5,1.5 119.5,1.5 ; 0.5,74.5 119.5,74.5
  text "1.5 (mm)" at -6.108,-1.257 h1.52

## Text inside footprints (layer, text, board x,y; h text height)
C20: Mechanical 1 "C1" at 72.25,70.037 h0.75 r270